# Altium PCB LED.PcbDoc
Units mm, origin at the board's own origin, x right, y up, seen from the top; angles counter-clockwise.
Board outline 20 x 20 mm, 2 copper layers (Top Layer, Bottom Layer), stack 1.671 mm thick; 5 components, 4 nets, 10 pads, 1 vias.
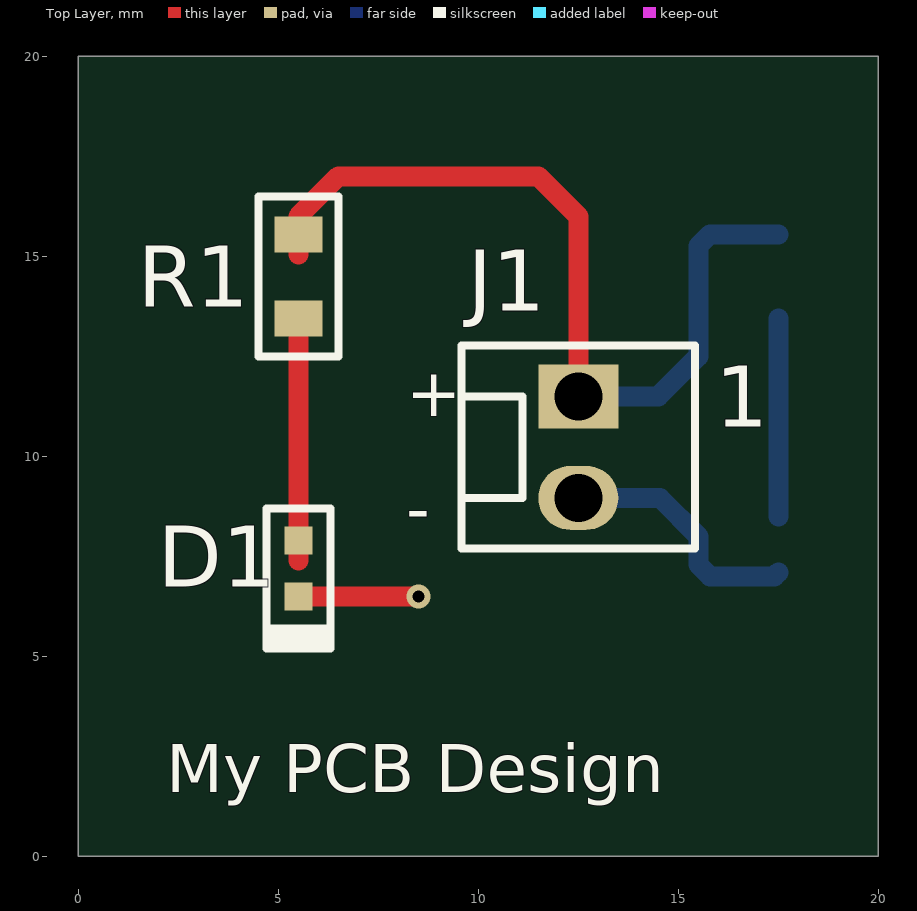
[diagram p0: Top Layer view]
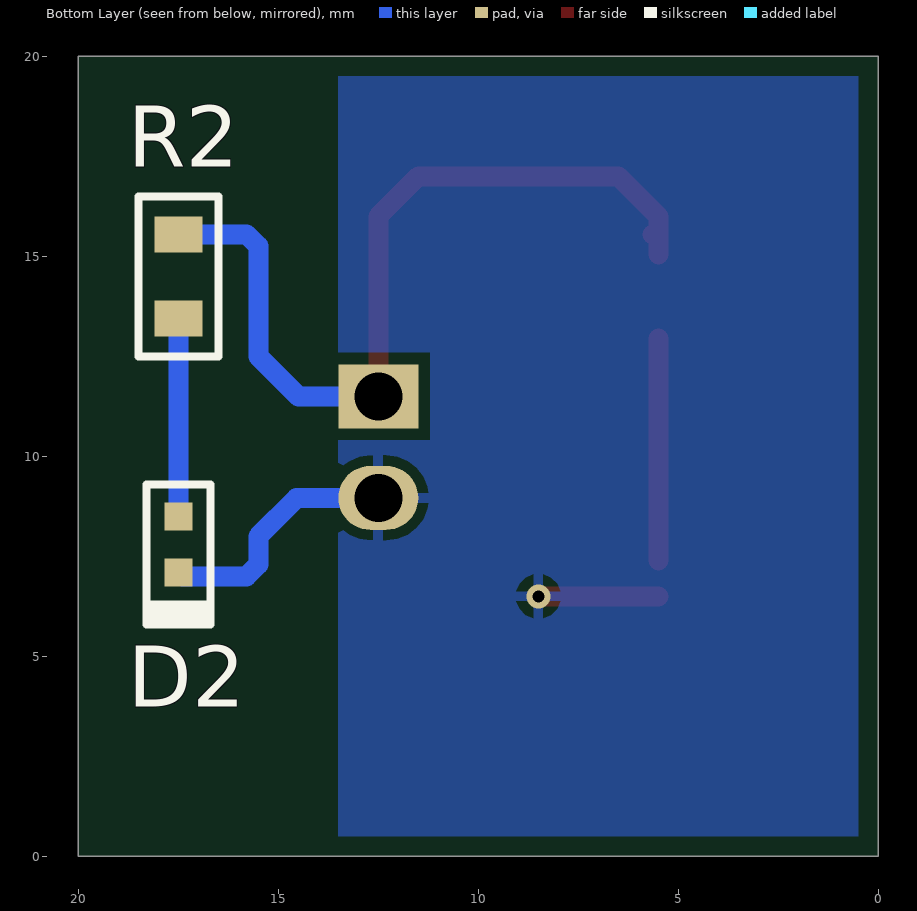
[diagram p1: Bottom Layer view, seen from below]
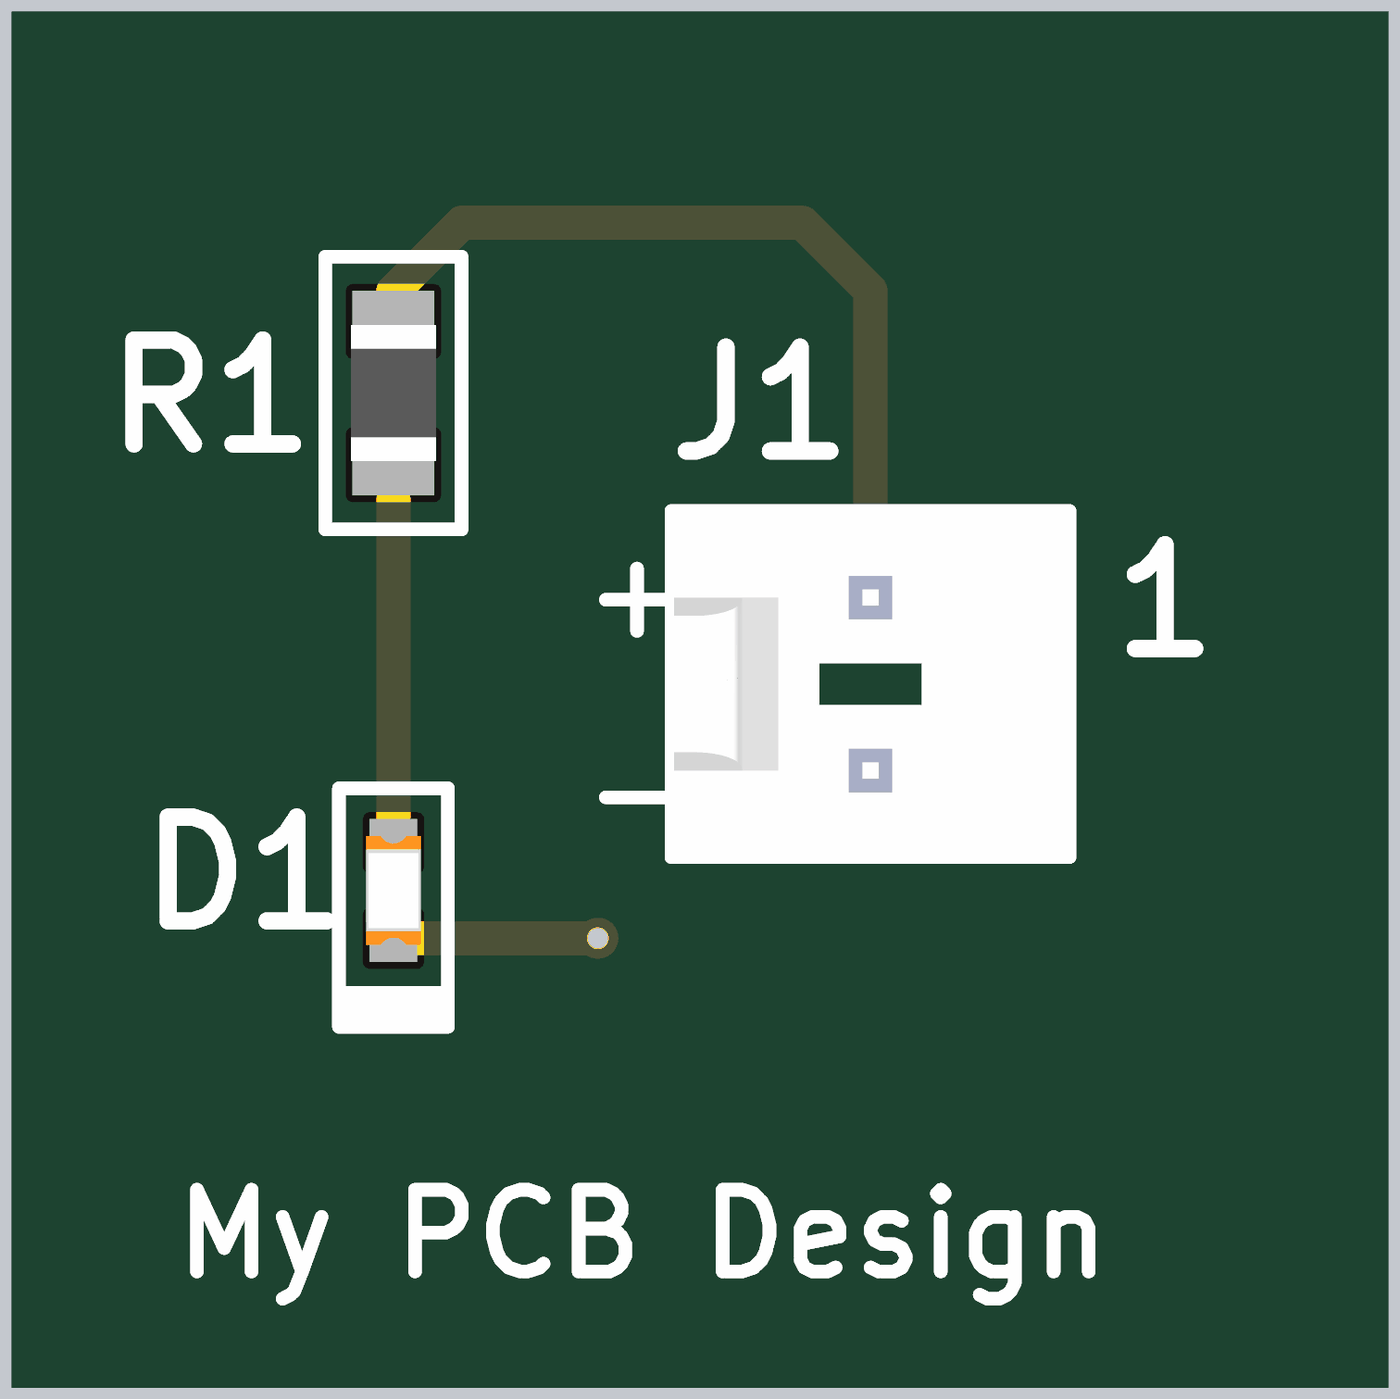
[diagram p2: 3D render of the assembled board from above, using the file's embedded part models]

## Layer stack, top to bottom
Top Solder: solder mask 0.0102, Solder Resist, Dk 3.5
Top Layer: signal copper 0.0356
Dielectric 1: dielectric 1.6, FR-4, Dk 4.8
Bottom Layer: signal copper 0.0356
Bottom Solder: solder mask 0.0102, Solder Resist, Dk 3.5

## Board outline
0,0 20,0 20,20 0,20

## Design rules (kind name [scope] priority, off if disabled: settings)
Clearance [All] p1: gap=0.3 ignorepadtopadclearanceinfootprint=FALSE
PolygonConnect [All] p1: connectstyle=Relief reliefconductorwidth=0.254 reliefentries=4 polygonreliefangle="90 Angle" airgapwidth=0.254
RoutingVias [All] p1: holewidth=0.3 width=0.6 viastyle="Through Hole" minholewidth=0.3 minwidth=0.6 maxholewidth=0.3 maxwidth=0.6
SilkToSolderMaskClearance [IsPad] p1: minsilkscreentomaskgap=0.1 clearancetoexposedcopper=TRUE
SolderMaskExpansion [All] p1: expansion=0.102 istentingtop=FALSE
Width [All] p1: maxlimit=1 minlimit=0.3 preferedwidth=0.5
29 further rules are at their usual default settings.

## Components (designator, comment, footprint, x,y, rotation, side; value= is the part's Value field where it differs from the comment)
D1 "GREEN" LED0603G 5.5,7.2 r90 top
D2 "GREEN" LED0603G 17.5,7.8 r90 bottom
J1 "1x2 Header" HDR1x2 12.5,11.5 r0 top
R1 "360R" R0805 5.5,14.5 r90 top value=360Ω
R2 "360R" R0805 17.5,14.5 r90 bottom value=360Ω

## Footprints (in the part's own frame and the unit in brackets; to place one, negate y for a bottom-side part, rotate by r counter-clockwise, add the part's x,y. Pads: shape width x height; smd on the part's side, far side on the other; paste and mask are expansions set on the pad)
HDR1x2 [mm]
  rect 2x1.6 hole 1.2: 1(0,0)
  oval 2x1.6 hole 1.2: 2(0,-2.54)
  silkscreen extent -2.92,-3.81 2.92,1.27, body extent -2.88,-3.81 2.92,1.27, height 11.71
LED0603G [mm]
  rect 0.7x0.7 smd: 1(-0.7,0) 2(0.7,0)
  silkscreen extent -2,-0.8 1.5,0.8, body extent -0.8,-0.4 0.8,0.4, height 0.59
R0805 [mm]
  rect 0.9x1.2 smd: 1(-1.05,0) 2(1.05,0)
  silkscreen extent -2,-1 2,1, body extent -1,-0.62 1,0.62, height 0.61

## Part data
D1 D2: library part LSM0603453V, "LED SM 0603 3V -/1000/-MCD GREEN", Case Code (Imperial)=0603, Case Code (Metric)=1608, Color=Green, Forward Voltage=2V, Lens Color=Colorless, Manufacturer="Visual Communications", Supplier Part Number 1=LSM0603453VCT-ND, Test Current=20mA, Case/Package=0603, Category=LEDs, ComponentLink1Description=http://www.farnell.com/datasheets/2699708.pdf?src-supplier=Farnell, ComponentLink1URL=http://www.farnell.com/datasheets/2699708.pdf?src-supplier=Farnell, ComponentLink2Description=http://www.farnell.com/datasheets/2699708.pdf?src-supplier=Newark, ComponentLink2URL=http://www.farnell.com/datasheets/2699708.pdf?src-supplier=Newark, ComponentLink3Description=https://vcclite.com/wp-content/uploads/wpallimport/files/files/LSM0603453V.pdf?src-supplier=Digi-Key, ComponentLink3URL=https://vcclite.com/wp-content/uploads/wpallimport/files/files/LSM0603453V.pdf?src-supplier=Digi-Key, Dominant Wavelength=572nm, Height=0.65mm, Length=1.6mm, Lens Size=0.8mm, Lens Style=Flat, Lens Transparency=Clear, Luminous Intensity=63mcd, Manufacturer Part Number=LSM0603453V, Mount="Surface Mount", Packaging="Cut Tape", Pricing 1="1=0.4, 10=0.247, 100=0.1421, 1000=0.11124, 2000=0.10197 (USD)", RoHS=Yes, RoHS Compliant=Yes, Series=LSM0603, Stock 1=90453, Supplier 1=Digi-Key, Viewing Angle=120°, Width=0.8mm
J1: library part 22-27-2021, "CONN HEADER VERT 2POS 2.54MM", Current Rating=4A, Flammability Rating="UL94 V-0", Housing Color=Natural, Manufacturer=Molex, Package Quantity=24000, Supplier Part Number 1=WM4111-ND, Voltage Rating=500V, Voltage Rating (DC)=250V, Category="Headers and Wire Housings", Contact Gender=Male, Contact Material=Tin, Contact Plating=Tin, Contact Type=-, Gender=Male, Housing Material=Nylon, Lead Free="Lead Free", Manufacturer Part Number=22-27-2021, Material=Nylon, Number of Positions=2, Number of Rows=1, Packaging=Bulk, Pitch=2.54mm, Pricing 1="1=0.3, 10=0.245, 100=0.18, 1000=0.14317, 5000=0.12272, 10000=0.11453 (USD)", RoHS=Yes, RoHS Compliant=Yes, Series=6410, Stock 1=143656, Supplier 1=Digi-Key, Termination="Through Hole", Weight=0.00769oz
R1 R2: library part 1029c3af85768c4190bb7ad29bc67b5, "RES SMD 360 OHM 1% 1/8W 0805", Manufacturer=Yageo, Manufacturer Part Number=AC0805FR-07360RL, Package=AC0805, Power Rating=1/8W, Resistance=360Ω, Temperature="-55°C to +155°C", Temperature Range High=+155°C, Temperature Range Low=-55°C, Tolerance=0.01, Voltage Rating=150V, Automotive=Yes, Automotive Grade="Grade 0", Category=Res, ComponentLink2Description=Datasheet, ComponentLink2URL=http://www.yageo.com/documents/recent/PYu-AC_51_RoHS_L_6.pdf, Composition="Thick Film", Device Class L1="Passive Components", Device Class L2=Resistors, Device Class L3="Chip SMD Resistors", Digikey Description="RES SMD 360 OHM 1% 1/8W 0805", Footprint Url=http://www.yageo.com/exep/pages/download/literatures/PYu-R_Mount_10.pdf, Height=0.6mm, Ipc Land Pattern Name=RESC200125X50, Lead Free=Yes, Octopart=https://octopart.com/ac0805fr-07360rl-yageo-71367690, RoHS=TRUE, Series=AC

## Via types
v1: diameter 0.6, hole 0.3, Top Layer to Bottom Layer, tented both sides, 1 vias

## Nets (pads, with @x,y where several pads share a name; then routed paths per layer and width w, separated by ;. In a path a pad name is that pad's centre, name@x,y a point inside that pad or via, vN(x,y) a via of type N, cw(c..) or ccw(c..) an arc to the next point about the centre after c; other vN are vias at no path point)
+3V3: J1.1 R1.2 R2.2 | length 21.7
  Top Layer w0.5: 5.5,15.05 5.5,16 6.5,17 11.5,17 12.5,16 J1.1 ; R1.2 R1.2@5.65,15.55
  Bottom Layer w0.5: J1.1 14.5,11.5 15.5,12.5 15.5,15.257 15.793,15.55 R2.2
DIODE1: D1.2 R1.1 | length 5.5
  Top Layer w0.5: 5.5,7.4 D1.2 5.5,12.95
DIODE2: D2.2 R2.1 | length 4.9
  Bottom Layer w0.5: D2.2 R2.1
GND: D1.1 D2.1 J1.2 | length 9.3
  Top Layer w0.5: D1.1 v1(8.5,6.5)
  Bottom Layer w0.5: J1.2 14.54,8.96 15.5,8 15.5,7.293 15.793,7 17.4,7 D2.1

## Polygon pours and split planes (outlines as drawn)
GND on Bottom Layer "GND_L02_P001" (solid, pour order 1): 0.5,0.5 13.5,0.5 13.5,19.5 0.5,19.5

## Silkscreen, mask and mechanical layers (free items; w line width, h text height)
Top Overlay:
  text "+" at 8.2,11 h1.2
  text "-" at 8.2,8.1 h1.2
  text "My PCB Design" at 2.2,1.6 h1.2
Board:
  the board outline again, w0.2

## Text inside footprints (layer, text, board x,y; h text height)
J1: Top Overlay "1" at 15.929,10.738 h1.52